# Altium PCB armBoardBeta.PcbDoc
Units mil, origin at the board's own origin, x right, y up, seen from the top; angles counter-clockwise.
Board outline 2225.94 x 1981.76 mil, 2 copper layers (Top Layer, Bottom Layer); 62 components, 60 nets, 227 pads, 70 vias.
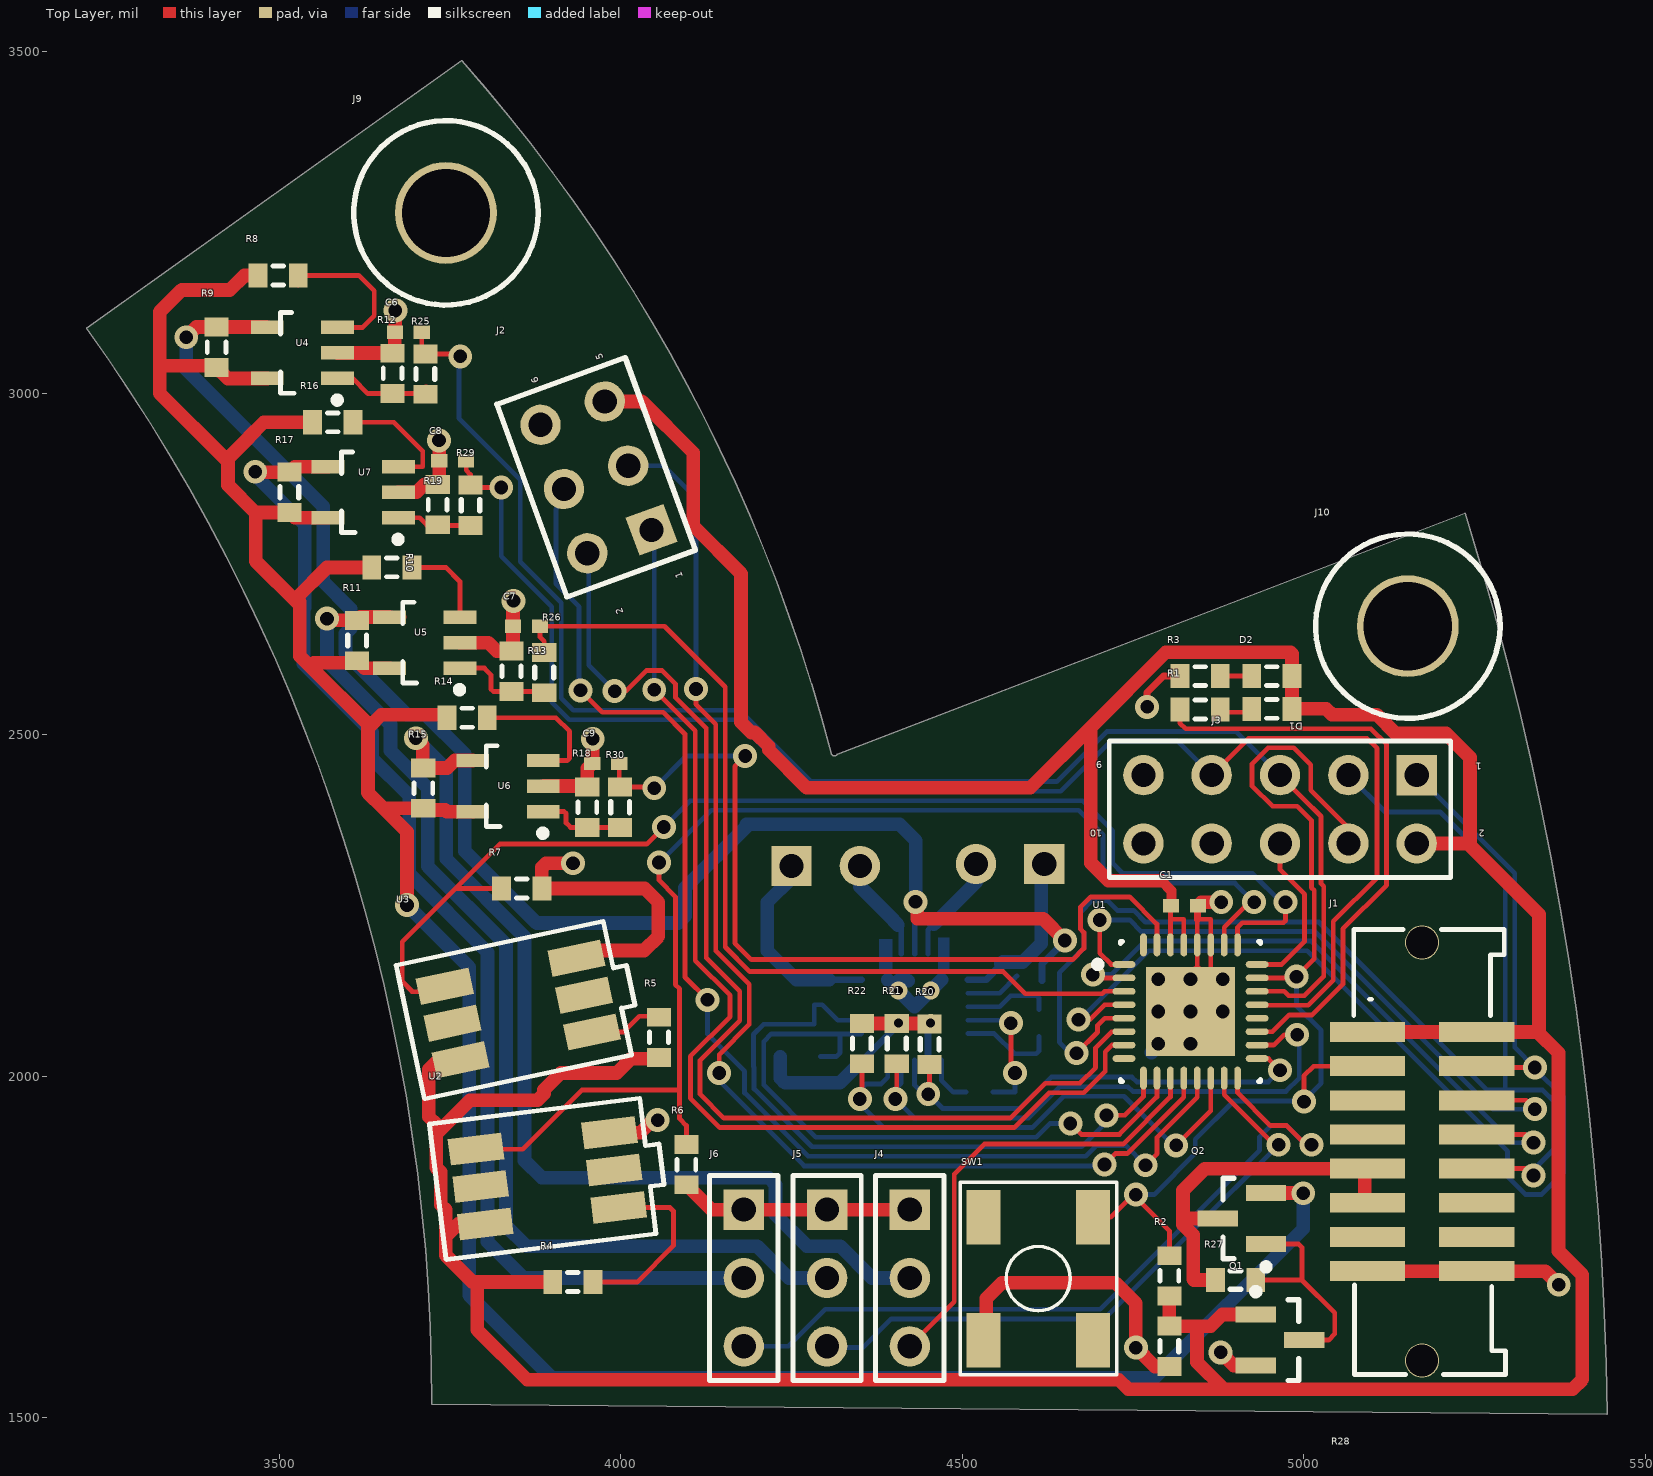
[diagram p0: Top Layer view]
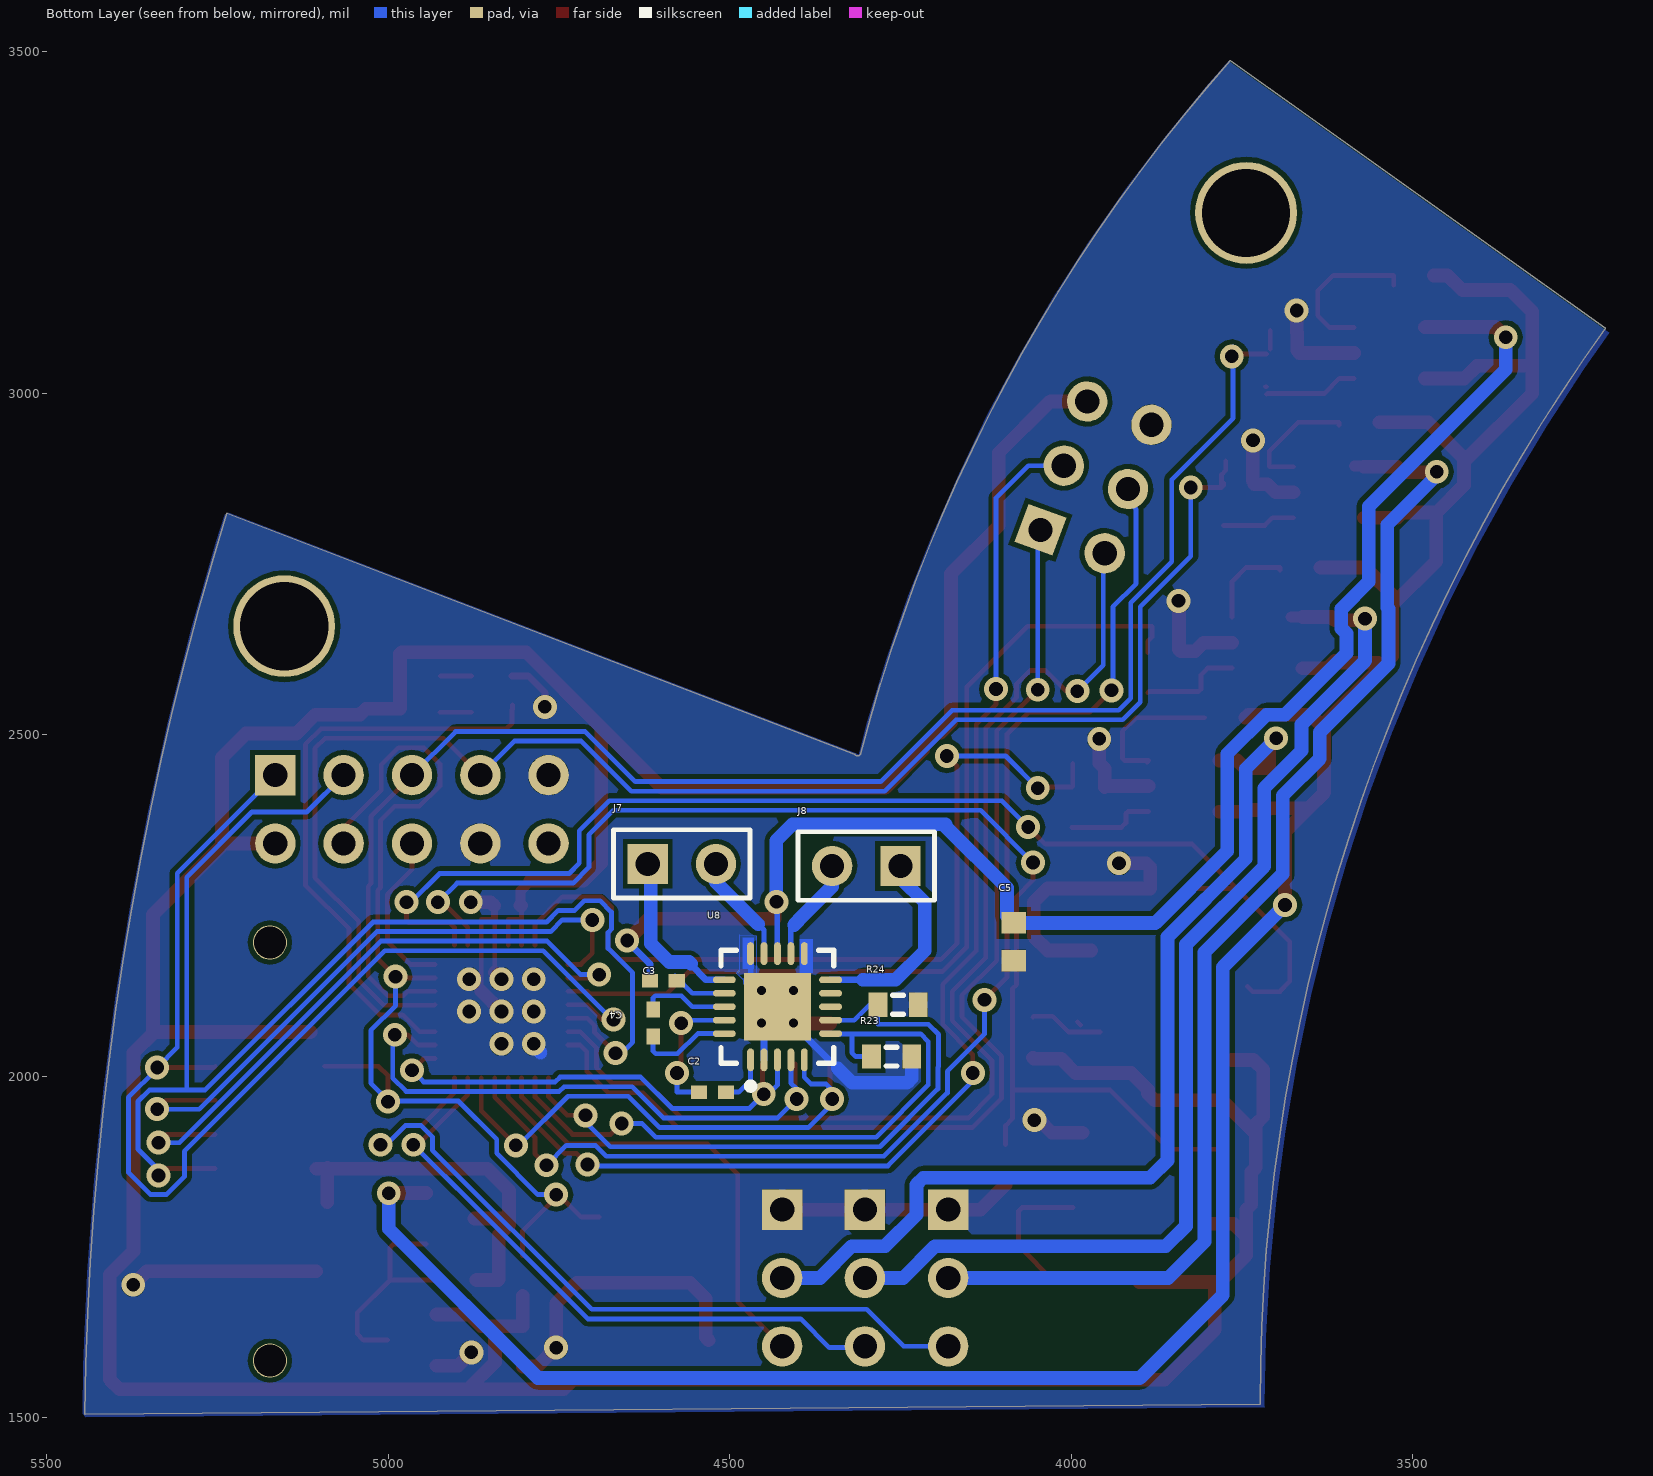
[diagram p1: Bottom Layer view, seen from below]

## Layer stack, top to bottom
Top Layer: signal copper 1.4
Dielectric: dielectric 12.6, FR-4, Dk 4.8
Bottom Layer: signal copper 1.4

## Board outline
3723.44,1519.91 ccw(c3718.43,1520) 3723.44,1519.99 ccw(c1023.38,1522.32) 3723.44,1522.32 ccw(c1023.38,1522.32) 3218.07,3095.12 3767.18,3486.93 cw(c1924.22,1852.95) 4307.91,2472.94 ccw(c4312.77,2474.2) 4316.98,2471.48 5235.25,2823.97 ccw(c5233.46,2828.65) 5236.11,2824.4 cw(c764.4,1443.71) 5444.01,1505.17

## Design rules (kind name [scope] priority, off if disabled: settings)
Clearance ClearanceGND [InNet('GND') vs InNet('GND')] p1: gap=0
Clearance ClearanceJ2 [InComponent('J2') vs Not InNet('GND')] p2: gap=0
Clearance ClearanceU7toU7 [InComponent('U7') vs InComponent('U7')] p3: gap=0
Clearance ClearanceU2toU2 [InComponent('U2') vs InComponent('U2')] p4: gap=0
Clearance ClearanceU1toU1 [InComponent('U1') vs InComponent('U1')] p5: gap=0
Clearance [All] p6: gap=7
ComponentClearance ComponentClearanceEdge [OnLayer('Mechanical 1')] p1: gap=15 collisioncheckmode=3 verticalgap=15 showdistances=FALSE
ComponentClearance ComponentClearance_1 [InComponent('J6')   or InComponent('J2')] p2: gap=0 collisioncheckmode=3 verticalgap=10 showdistances=FALSE
ComponentClearance [All] p3: gap=10 collisioncheckmode=3 verticalgap=10 showdistances=FALSE
HoleToHoleClearance HoleToHoleClearanceComponentU2 [InComponent('U2') vs InComponent('U2')] p1: gap=0 allowstackedmicrovias=TRUE
HoleToHoleClearance [All] p2: gap=7 allowstackedmicrovias=TRUE
MinimumSolderMaskSliver [All] p1: minsoldermaskwidth=7
PolygonConnect [All] p1: connectstyle=Relief reliefconductorwidth=10 reliefentries=4 polygonreliefangle="90 Angle"
RoutingVias [All] p1: holewidth=20 width=35 viastyle="Through Hole" minholewidth=20 minwidth=35 maxholewidth=28 maxwidth=50
SMDNeckDown [All] p1: percent=110.000
SilkToSilkClearance [All] p1: silktosilkclearance=0
SilkscreenOverComponentPads [All] p1: minsilkscreentomaskgap=0
SolderMaskExpansion [All] p1: expansion=4
Width "Schematic Width Constraint_VCC" [InNet('VBAT_SWITCHED')] p1: maxlimit=20 minlimit=7 preferedwidth=20
Width "Schematic Width Constraint_MOT0B" [InNet('MOT0_B')] p2: maxlimit=20 minlimit=7 preferedwidth=20
Width "Schematic Width Constraint_MOT0A" [InNet('MOT0_A')] p3: maxlimit=20 minlimit=7 preferedwidth=20
Width "Schematic Width Constraint_MOT1A" [InNet('MOT1_A')] p4: maxlimit=20 minlimit=7 preferedwidth=20
Width "Schematic Width Constraint_MOT1B" [InNet('MOT1_B')] p5: maxlimit=20 minlimit=7 preferedwidth=20
Width "Schematic Width Constraint_VBAT" [InNet('VBAT')] p6: maxlimit=20 minlimit=7 preferedwidth=20
Width "Schematic Width Constraint_GND" [InNet('GND')] p7: maxlimit=20 minlimit=7 preferedwidth=20
Width "Schematic Width Constraint_33V" [InNet('3.3V')] p8: maxlimit=20 minlimit=7 preferedwidth=20
Width Width_SERVOPOWER [InNet('SERVO0_POWER')  or  InNet('SERVO1_POWER')  or    InNet('SERVO2_POWER')  or    InNet('MOTOR_POWER')] p9: maxlimit=30 minlimit=7 preferedwidth=20
Width [All] p10: maxlimit=10 minlimit=7 preferedwidth=7
23 further rules are at their usual default settings.

## Components (designator, comment, footprint, x,y, rotation, side; value= is the part's Value field where it differs from the comment)
C1 "Cap Semi" CAPC1005L 4825,2250 r180 top
C2 "Cap Semi" CAPC1005L 4525,1977 r0 bottom
C3 "Cap Semi" CAPC1005L 4612,2078 r270 bottom
C4 "Cap Semi" CAPC1005L 4597,2140 r0 bottom
C5 "Cap Semi" CAPC1608L 4084,2197 r90 bottom
C6 "Cap Semi" CAPC1005L 3689,3089 r0 top
C7 "Cap Semi" CAPC1005L 3862,2659 r0 top
C8 "Cap Semi" CAPC1005L 3754,2901 r0 top
C9 "Cap Semi" CAPC1005L 3978,2458 r0 top
D1 "Heartbeat" SurfaceMount(603) 4953,2538 r180 top
D2 "Power LED" SurfaceMount(603) 4953,2586 r180 top
J1 "header" "HEADERSM 8X2" 5173,1890 r0 top
J2 "Header 3X2" HDR2X3 4045,2800 r110 top
J3 "JTAG" HDR2X5 5165,2441 r180 top
J4 "Header 3" HDR1X3 4423,1805 r270 top
J5 "Header 3" HDR1X3 4302,1805 r270 top
J6 "Header 3" HDR1X3 4180,1805 r270 top
J7 "Header 2" HDR1X2 4620,2311 r180 bottom
J8 "Header 2" HDR1X2 4250,2308 r0 bottom
J9 "Mechanical_Hole" #4_Screw_Hole 3744,3264 r0 top
J10 "Mechanical_Hole" #4_Screw_Hole 5152,2659 r0 top
Q1 "N-Mosfet" SOT-23 4965,1614 r0 top
Q2 "P-Mosfet" SOT-23 4909,1792 r180 top
R1 "DiodeRes" J1-0603 4848,2537 r180 top
R2 "ResetRes" J1-0603 4803,1708 r90 top
R3 "DiodeRes" J1-0603 4848,2586 r180 top
R4 "RLOAD" J1-0603 3930,1699 r0 top
R5 "RLOAD" J1-0603 4056,2057 r90 top
R6 "RLOAD" J1-0603 4096,1871 r270 top
R7 "RLOAD" J1-0603 3855,2275 r0 top
R8 "R_IN" J1-0603 3498.42,3172.4 r0 top
R9 "RLOAD" J1-0603 3408.42,3067.4 r90 top
R10 "R_IN" J1-0603 3665,2745 r0 top
R11 "RLOAD" J1-0603 3614,2638 r270 top
R12 "R_OUT" J1-0603 3666,3029 r90 top
R13 "R_OUT" J1-0603 3840,2593 r270 top
R14 "R_IN" J1-0603 3775,2525 r0 top
R15 "RLOAD" J1-0603 3711,2422 r90 top
R16 "R_IN" J1-0603 3578.42,2957.4 r0 top
R17 "RLOAD" J1-0603 3515,2855 r90 top
R18 "R_OUT" J1-0603 3951,2394 r270 top
R19 "R_OUT" J1-0603 3732,2837 r90 top
R20 "MotorRes" J1-0603 4452,2047 r90 top
R21 "MotorRes" J1-0603 4404,2048 r90 top
R22 "MotorRes" J1-0603 4353,2048 r90 top
R23 "MotorRes" J1-0603 4263,2029 r180 bottom
R24 "MotorRes" J1-0603 4253.53,2105 r180 bottom
R25 "R_OUT" J1-0603 3714,3028 r90 top
R26 "R_OUT" J1-0603 3888,2591 r90 top
R27 "RLOAD" J1-0603 4900,1702 r0 top
R28 "RLOAD" J1-0603 4803,1605 r270 top
R29 "R_OUT" J1-0603 3780,2836 r90 top
R30 "R_OUT" J1-0603 3999,2394 r90 top
SW1 "Switch-TL330" SwitchTall-TL330 4611,1704 r270 top
U1 "MSP430G2553" QFN-32 4834,2095 r0 top
U2 "absoluteEncoder" absoluteEncoder 4000,1864 r187 top
U3 "absoluteEncoder" absoluteEncoder 3956,2121 r192 top
U4 "LT6106" TSOT-23-5_LT6106 3534,3059 r180 top
U5 "LT6106" TSOT-23-5_LT6106 3713,2635 r180 top
U6 "LT6106" TSOT-23-5_LT6106 3835,2425 r180 top
U7 "LT6106" TSOT-23-5_LT6106 3623,2855 r180 top
U8 "MOTOR-A3906" QFN-20 4430,2102 r90 bottom

## Footprints (in the part's own frame and the unit in brackets; to place one, negate y for a bottom-side part, rotate by r counter-clockwise, add the part's x,y. Pads: shape width x height; smd on the part's side, far side on the other; paste and mask are expansions set on the pad)
#4_Screw_Hole [mil] "#4 Screw Hole, 3.2766mm Hole Dia., Plated"
  round 149 hole 129: 1(0,0)
  silkscreen extent -135,-135 135,135
absoluteEncoder [mm] "Absolute Encoder EE-SX1131"
  rect 2x1 smd: A(0.25,1.4) C(5.25,1.4) E1(5.25,0) E2(5.25,-1.4) K(0.25,-1.4) NC(0.25,0)
  silkscreen extent -1.52,-2.54 6.86,2.54
CAPC1005L [mm] "Chip Capacitor, Body 1.0x0.5mm, IPC High Density"
  rect 0.6x0.5 smd: 1(-0.5,0) 2(0.5,0)
  body extent -0.55,-0.3 0.55,0.3, height 1.3
CAPC1608L [mm] "Chip Capacitor, Body 1.6x0.8mm, IPC High Density"
  rect 0.8x0.9 smd: 1(-0.7,0) 2(0.7,0)
  body extent -0.87,-0.48 0.87,0.48, height 1.3
HDR1X2 [mm] "Connector; Header; 2 Position"
  rect 1.5x1.5 hole 0.9: 1(0,0)
  round 1.5 hole 0.9: 2(2.54,0)
  silkscreen extent -1.27,-1.27 3.81,1.27
HDR1X3 [mm] "Connector; Header; 3 Position"
  rect 1.5x1.5 hole 0.9: 1(0,0)
  round 1.5 hole 0.9: 2(2.54,0) 3(5.08,0)
  silkscreen extent -1.27,-1.27 6.35,1.27
HDR2X3 [mm] "Connector; Header; 3x2 Position"
  rect 1.5x1.5 hole 0.9: 1(0,0)
  round 1.5 hole 0.9: 2(0,2.54) 3(2.54,0) 4(2.54,2.54) 5(5.08,0) 6(5.08,2.54)
  silkscreen extent -1.27,-1.27 6.35,3.81
HDR2X5 [mm] "Connector; Header; 5x2 Position"
  rect 1.5x1.5 hole 0.9: 1(0,0)
  round 1.5 hole 0.9: 2(0,2.54) 3(2.54,0) 4(2.54,2.54) 5(5.08,0) 6(5.08,2.54) 7(7.62,0) 8(7.62,2.54) 9(10.16,0) 10(10.16,2.54)
  silkscreen extent -1.27,-1.27 11.43,3.81
"HEADERSM 8X2" [mm]
  rect 2.795x0.74 smd: 1(-2.033,4.445) 2(2.033,4.445) 3(-2.033,3.175) 4(2.033,3.175) 5(-2.033,1.905) 6(2.033,1.905) 7(-2.033,0.635) 8(2.033,0.635) 9(-2.033,-0.635) 10(2.033,-0.635) 11(-2.033,-1.905) 12(2.033,-1.905) 13(-2.033,-3.175) 14(2.033,-3.175) 15(-2.033,-4.445) 16(2.033,-4.445)
  round 1.27 hole 1.19: c1(0,7.773) c2(0,-7.773)
  silkscreen extent -2.54,-8.29 3.1,8.25
J1-0603 [mm] "Chip Resistor, Body 1.6x0.8mm, IPC High Density"
  rect 0.7x0.9 smd: 1(-0.75,0) 2(0.75,0)
  silkscreen extent -0.2,-0.35 0.2,0.35, body extent -0.85,-0.48 0.85,0.48, height 0.9
QFN-20 [mm] "QFN, 20-Leads, Body 4.2x4.2mm (max), Pitch 0.50mm, IPC Medium Density"
  oval 0.85x0.25 smd: 1(-1.975,1) 2(-1.975,0.5) 3(-1.975,0) 4(-1.975,-0.5) 5(-1.975,-1) 11(1.975,-1) 12(1.975,-0.5) 13(1.975,0) 14(1.975,0.5) 15(1.975,1)
  oval 0.25x0.85 smd: 6(-1,-1.975) 7(-0.5,-1.975) 8(0,-1.975) 9(0.5,-1.975) 10(1,-1.975) 16(1,1.975) 17(0.5,1.975) 18(0,1.975) 19(-0.5,1.975) 20(-1,1.975)
  rect 2.5x2.5 smd: 21(0,0)
  silkscreen extent -3.07,-2.1 2.1,2.1, body extent -2.07,-2.07 2.07,2.07, height 0.8
QFN-32 [mm] "QFN, 32-Leads, Body 5.2x5.2mm (max), Pitch 0.50mm, IPC Medium Density"
  oval 0.85x0.25 smd: 1(-2.475,1.75) 2(-2.475,1.25) 3(-2.475,0.75) 4(-2.475,0.25) 5(-2.475,-0.25) 6(-2.475,-0.75) 7(-2.475,-1.25) 8(-2.475,-1.75) 17(2.475,-1.75) 18(2.475,-1.25) 19(2.475,-0.75) 20(2.475,-0.25) 21(2.475,0.25) 22(2.475,0.75) 23(2.475,1.25) 24(2.475,1.75)
  oval 0.25x0.85 smd: 9(-1.75,-2.475) 10(-1.25,-2.475) 11(-0.75,-2.475) 12(-0.25,-2.475) 13(0.25,-2.475) 14(0.75,-2.475) 15(1.25,-2.475) 16(1.75,-2.475) 25(1.75,2.475) 26(1.25,2.475) 27(0.75,2.475) 28(0.25,2.475) 29(-0.25,2.475) 30(-0.75,2.475) 31(-1.25,2.475) 32(-1.75,2.475)
  rect 3.3x3.3 smd: 33(0,0)
  silkscreen extent -3.57,-2.6 2.6,2.6, body extent -2.57,-2.58 2.58,2.57, height 1
SOT-23 [mm] "SOT23, 3-Leads, Body 3.0x2.5mm (max), Pitch 0.95mm, IPC Medium Density"
  rect 1.5x0.6 smd: 1(-0.9,0.95) 2(-0.9,-0.95) 3(0.9,0)
  silkscreen extent -1.02,-1.5 0.7,1.92, body extent -0.7,-1.5 0.7,1.5, height 1.2
SurfaceMount(603) [mm]
  rect 0.7x0.9 smd: 1(-0.75,0) 2(0.75,0)
  silkscreen extent -0.2,-0.35 0.2,0.35, body extent -0.85,-0.48 0.85,0.48, height 0.9
SwitchTall-TL330 [mil] "Small SMDTall Tact Switch E-Switch TL330"
  rect 80x50 smd: 1(-90,80) 2(90,80) 3(-90,-80) 4(90,-80)
  silkscreen extent -141,-114 141,115
TSOT-23-5_LT6106 [mm] "A SOT-23 package with 5 pins for LT6106"
  rect 1.22x0.5 smd: 1(-1.31,0.95) 2(-1.31,0) 3(-1.31,-0.95) 4(1.31,-0.95) 5(1.31,0.95)
  silkscreen extent -1.42,-1.5 0.81,1.88, body extent -0.81,-1.5 0.84,1.5, height 1.2

## Part data
C1 C2 C3 C4 C5 C6 C7 C8 C9: "Capacitor (Semiconductor SIM Model)"
D1 D2: library part LED
J1: library part "HEADER 8X2"
J2: "Header, 3-Pin, Dual row"
J3: library part "Header 5X2", "Header, 5-Pin, Dual row"
J4 J5 J6: "Header, 3-Pin"
J7 J8: "Header, 2-Pin"
J9 J10: "A mechanical hole for mounting the board"
R1 R2 R3 R4 R5 R6 R7 R8 R9 R10 R11 R12 R13 R14 R15 R16 R17 R18 R19 R20 R21 R22 R23 R24 R25 R26 R27 R28 R29 R30: library part Res3, "Resistor"
U4 U5 U6 U7: "Current Sense Amplifier"

## Via types
v1: diameter 35, hole 20, Top Layer to Bottom Layer, 66 vias
v2: diameter 25.98, hole 12.99, Top Layer to Bottom Layer, tented top, 4 vias

## Nets (pads, with @x,y where several pads share a name; then routed paths per layer and width w, separated by ;. In a path a pad name is that pad's centre, name@x,y a point inside that pad or via, vN(x,y) a via of type N, cw(c..) or ccw(c..) an arc to the next point about the centre after c; other vN are vias at no path point)
3.3V: C1.2 D1.1 D2.1 J1.1 J1.2 J2.5 J3.2 Q1.1 R2.1 R4.1 R5.1 R28.1 U1.29 U1.30 U2.C U3.C | length 6598.8
  Top Layer w7: U1.30 C1.2@4804.47,2240.47 ; 4804.84,2230 4824.16,2230 U1.29
  Top Layer w15: 4791.5,2286.5 4806,2272 C1.2@4806,2250.69
  Top Layer w20: U3.C 3733.11,2024.11 3719,2010 3719,1941 3729.66,1930.34 3729.66,1915.3 ; U2.C 3762.1,1784.1 3744,1766 ; R4.1 3790,1699 ; J2.5 4030.94,2987.94 4106,2912.88 4106,2806 4176,2736 4176,2518.5 4191,2503.5 4196.29,2503.5 4216.5,2483.29 4216.5,2478 4272,2422.5 4599.43,2422.5 4688.1,2511.17 ; R5.1 4054.53,2026 4015,2026 3994,2005 3912,2005 3887.5,1980.5 3887.5,1974.49 3878.01,1965 3779.35,1965 3729.66,1915.3 ; 4791.5,2286.5 4714,2286.5 4688.1,2312.4 4688.1,2511.17 ; R2.1 R28.1 4837,1634.53 ; C1.2 C1.2@4806,2250.69 ; Q1.1 4880.4,1651.4 4863.53,1634.53 4837,1634.53 ; J1.1@5112.98,2065 J1.2 5342,2065 ; J3.2 5240,2341 ; 3729.66,1915.3 3729.66,1866.72 3736.37,1860 3736.37,1812.23 3744,1804.6 3744,1766 ; 3744,1766 3744,1738 3783,1699 3790,1699 ; 3790,1699 3790,1629 3863,1556 4729,1556 4743,1542 4883.21,1542 ; 4688.1,2511.17 4797.65,2620.72 4980.34,2620.72 4982.53,2618.53 D2.1 D1.1 5032.53,2538 5041,2529.53 5106.46,2529.53 5133.99,2502 5208,2502 5243,2467 5243,2338 5344,2237 5344,2067 5342,2065 ; 4837,1634.53 4843.5,1628.03 4843.5,1581.71 4883.21,1542 ; 4883.21,1542 5393,1542 5407.5,1556.5 5407.5,1709.29 5372.5,1744.29 5372.5,2034.5 5342,2065
ENCODER0: R6.1 U1.26 U2.E2 | length 1839.2
  Top Layer w7: U2.E2 3856.52,1893.52 3943,1980 4085,1980 4086,1979 ; U2.E2@3801.56,1885.56 U2.E2@3805.13,1882 ; v1(4056,2313) 4056,2287 4080,2263 4080,2134 4086,2128 4086,1979 ; R6.1 4096,1928 4086,1938 4086,1979 ; U1.26 4883.21,2218.11 4920.1,2255 v1(4927,2255)
  Bottom Layer w7: v1(4056,2313) 4132.5,2389.5 4670.28,2389.5 4706,2353.78 4706,2306.2 4729.2,2283 4899,2283 v1(4927,2255)
ENCODER1: R7.1 U1.25 U3.E2 | length 1792.6
  Top Layer w7: U3.E2 3734.42,2124 3694,2124 3694,2125 3680,2139 3680,2197 3758,2275 ; R7.1 3758,2275 ; v1(4063,2365) 4038,2340 3823,2340 3758,2275 ; U1.25 4902.9,2218 4909.9,2225 4970,2225 4973,2228 v1(4973,2255)
  Bottom Layer w7: v1(4063,2365) 4101.5,2403.5 4676.07,2403.5 4720,2359.57 4720,2312 4735,2297 4924.6,2297 4966.6,2255 v1(4973,2255)
FTDI_RX: J1.5
FTDI_TX: J1.7
GND: C1.1 C5.1 C6.1 C7.1 C8.1 C9.1 J1.15 J1.16 J2.6 J3.8 J3.9 J4.1 J5.1 J6.1 Q1.2 R3.2 R6.2 R7.2 R12.2 R13.1 R18.1 R19.2 R20.2 R21.2 R22.2 R23.2 R24.2 R28.2 SW1.4 U1.27 U1.28 U1.33 U2.K U3.K U4.2 U5.2 U6.2 U7.2 U8.2 U8.11 U8.15 U8.21 | length 3155.9
  Top Layer w7: U1.33@4843.84,2152.09 U1.28 4843.84,2229.84 ; 4844,2230 4863.53,2230 U1.27 U1.33@4863.53,2124.53
  Top Layer w10: v1(4770.47,2541) 4770.47,2562.09 4794.39,2586 R3.2 ; 4843.84,2229.84 4844,2230 C1.1@4844,2250
  Top Layer w20: U4.2 R12.2@3665.47,3059 ; R12.2 3665.53,3059 R12.2@3665.47,3059 ; v1(3670,3121) 3670,3089.69 C6.1 3669.32,3062.84 R12.2@3665.47,3059 ; U7.2 3701,2855 3713,2867 3731.53,2867 R19.2 ; v1(3734,2931) 3734.32,2930.68 C8.1 R19.2@3734.32,2871.84 ; U5.2 3806,2635 3818.47,2622.53 R13.1 3842.32,2624.84 C7.1 3842.32,2695.32 v1(3843,2696) ; U6.2 3949.53,2425 R18.1 3951,2450.69 C9.1 3959,2458.69 v1(3959,2494) ; v1(3930,2312) 3890.53,2312 3884.53,2306 R7.2 4035,2275 4055,2255 4055,2205 4034.21,2184.21 U3.K@3970.58,2184.21 ; U2.K 4028.51,1917.51 4048,1937 4054,1937 v1(4054,1936) ; R6.2 4132.47,1805 J6.1 J5.1 J4.1 ; R22.2 R21.2 R20.2@4451,2077.53 ; SW1.4 4535,1618 4535,1675 4558,1698 4724,1698 4754,1668 v1(4754,1603) 4781.53,1575.47 R28.2 ; v1(4834,2095) U1.33@4863.53,2124.53 ; v1(4834,2142.24) U1.33@4843.84,2152.09 ; C1.1 4849.69,2255 v1(4879,2255) ; v1(4878,1596) 4897.4,1576.6 Q1.2 ; J1.15@5104.98,1715 J1.16 5353,1715 v1(5373,1695)
  Bottom Layer w8: U8.21@4390.63,2141.37 U8.11 ; U8.21@4469.37,2141.37 U8.15
  Bottom Layer w10: 4341.79,2011.79 U8.21@4405.5,2075.5 ; U8.2 U8.21@4449.69,2074.44
  Bottom Layer w20: R23.2 4233.47,1997.53 4240.5,1990.5 4320.5,1990.5 4341.79,2011.79 ; U8.21@4390.63,2141.37 v2(4406.38,2125.62) U8.21 v2(4453.62,2125.62) U8.21@4469.37,2141.37 ; U8.21@4407.13,2140.68 U8.21@4420.76,2140 ; U8.21@4449.69,2074.44 v2(4453.62,2078.38) ; v1@4776.76,2035 4786.76,2045 v1(4786.76,2047.76)
  other v1: 4834,2047.76 4786.76,2095 4881.24,2095 4786.76,2142.24 4881.24,2142.24
  other v2: 4406.38,2078.38
GPIO0: J2.1 U1.7 | length 1627.3
  Top Layer w7: v1(4049,2566) 4109,2506 4109,2169.6 4160,2118.6 4160,2087.6 4102,2029.6 4102,1968 4145,1925 4576,1925 4627,1976 4677.8,1976 4709,2007.2 4709,2036.2 4718.59,2045.79 U1.7
  Bottom Layer w7: J2.1 4049,2796 v1@4049,2567 ; v1(4049,2566) v1@4049,2567 ; v1@4052,2564 v1@4049,2567
GPIO1: J2.2 U1.6 | length 1695.9
  Top Layer w7: v1(3991,2564) 4007.4,2564 4037.4,2594 4060.6,2594 4080,2574.6 4080,2554.8 4125,2509.8 4125,2173.4 4174,2124.4 4174,2081.8 4116,2023.8 4116,1973.8 4150.8,1939 4570.2,1939 4621.2,1990 4672,1990 4695,2013 4695,2042 4718.47,2065.47 U1.6
  Bottom Layer w7: J2.2 3953,2763.83 3953,2602 v1(3991,2564)
GPIO2: J2.3 U1.12 | length 1824.1
  Top Layer w7: v1(4110,2567) 4110,2544.6 4139,2515.6 4139,2401.99 4139,2183.6 4188,2134.6 4188,2076 4144,2032 v1(4144,2005) ; v1(4708,1871) 4724,1887 4741.4,1887 4824.16,1969.76 U1.12
  Bottom Layer w7: J2.3 4063.03,2893.97 4110,2847 v1(4110,2567) ; v1(4144,2005) 4144,1993.3 4268.3,1869 4706,1869 v1(4708,1871)
GPIO3: J2.4 U1.13 | length 1858.2
  Top Layer w7: v1(3941,2565) 3973,2533 4062,2533 4094,2501 4094,2145 v1(4127,2112) ; v1(4768,1870) 4785,1887 4785,1910.6 4843.84,1969.44 U1.13
  Bottom Layer w7: J2.4 3916.83,2841.95 3905,2830.12 3905,2721.2 3939,2687.2 3939,2578 3941,2576 v1(3941,2565) ; v1(4127,2112) 4127,2061.6 4181.19,2007.41 4181.19,1975.91 4274.1,1883 4680.4,1883 4696.4,1899 4739,1899 v1(4768,1870)
I2C_SCL: J1.13
I2C_SDA: J1.14
JTAG_BOTTOM_TCK_SPI_CLK: J1.4 J3.1 U1.4 | length 1767
  Top Layer w7: v1(4670,2083) 4686.4,2083 4708.24,2104.84 U1.4 ; J1.4 5255.02,2013 v1(5338,2013)
  Bottom Layer w7: v1(4670,2083) 4672,2083 4773,2184 5004.6,2184 5298,1890.6 5298,1853.4 5324.4,1827 5347.6,1827 5380,1859.4 5380,1969.4 5338,2011.4 v1(5338,2013) 5308.61,2042.39 5308.61,2297.39 J3.1
JTAG_BOTTOM_TDI_SERVO2_SENSE: C8.2 J3.7 R29.2 U1.21 | length 2274.4
  Top Layer w7: C8.2 3773.69,2887.31 3780,2881 R29.2 3777,2868.53 3777,2865.53 3780.53,2862 v1(3825,2862) ; J3.7 4919.03,2495.03 5092.17,2495.03 5107,2480.2 5107,2291 5043,2227 5043,2140.6 5006.4,2104 4932.28,2104 U1.21
  Bottom Layer w7: v1(3825,2862) 3825,2761.6 3899,2687.6 3899,2547.6 3924.6,2522 4168.6,2522 4273.1,2417.5 4643.89,2417.5 4717.2,2490.8 4815.2,2490.8 J3.7
JTAG_BOTTOM_TDO_MOTOR_SENSE: C6.2 J3.5 R25.2 U1.22 | length 2300.4
  Top Layer w7: R25.2@3708.69,3064.84 C6.2 C6.2@3708.69,3092 ; R25.2 3761.47,3057.53 v1(3765,3054) ; U1.22 4970.87,2124.53 4977.4,2118 5000.6,2118 5029,2146.4 5029,2278.2 5024.97,2282.22 5024.97,2380.43 4999.23,2406.18 ; J3.5@4964,2465 4964,2441.41 J3.5@4965,2440.41 ; J3.5 J3.5@4965,2440.41 ; 5018.03,2387.38 4999.23,2406.18 ; J3.5@4965,2440.41 4999.23,2406.18
  Bottom Layer w7: v1@3763,3068 3763,2963.6 3853,2873.6 3853,2753.4 3913,2693.4 3913,2553.4 3930.4,2536 4174.4,2536 4278.9,2431.5 4638.09,2431.5 4711.4,2504.8 4901.2,2504.8 J3.5
JTAG_BOTTOM_TEST: J3.6 U1.24 | length 241.8
  Top Layer w7: U1.24 4967.3,2163.9 5001,2197.6 5001,2266.6 4965,2302.6 J3.6
JTAG_BOTTOM_TMS_SPI_SEL_EXPAND0: J1.10 J3.3 U1.5 | length 1968.3
  Top Layer w7: v1(4667,2034) 4698,2065 4698,2074.8 4708.35,2085.16 U1.5 ; J1.10 5326,1865 v1(5336,1855)
  Bottom Layer w7: v1(4667,2034) 4658,2034 4642,2050 4642,2151.4 4678,2187.4 4678,2210.6 4673,2215.6 4673,2240.6 4689.4,2257 4712.6,2257 4726.6,2243 4750.8,2243 4767.8,2226 5021.99,2226 5267.99,1980 5349.6,1980 5366,1963.6 5366,1893.4 5336,1863.4 v1(5336,1855) ; J3.3 5119,2387 5199.2,2387 5294.61,2291.59 5294.61,1980
LED_HEARTBEAT: R1.2 U1.19 | length 874.4
  Top Layer w7: R1.2@4817.94,2537 R1.2@4817.94,2544 ; R1.2 4818.47,2517.2 4826.89,2508.78 4895.66,2508.78 4895.9,2509.03 5097.97,2509.03 5121,2486 5121,2280 5057,2216 5057,2134.8 5012.2,2090 4978.4,2090 4953.87,2065.47 U1.19
MOT0_A: J7.1 U8.16 | length 253.1
  Bottom Layer w10: U8.16 4534.37,2141.37 4557.19,2164.19 4560.5,2167.5
  Bottom Layer w20: 4556.5,2164.88 4559.12,2167.5 4560.5,2167.5 4588.39,2167.5 4615.5,2194.61 4615.5,2306.5 J7.1
MOT0_B: J7.2 U8.14 | length 160.4
  Bottom Layer w8: U8.14 4449.69,2213.99 4458.35,2222.65
  Bottom Layer w20: 4458.35,2222.65 4520,2284.3 J7.2
MOT0_PWMA: R21.1 U1.18 U8.4 | length 875.3
  Top Layer w7: v1(4402,1967) 4404,1969 R21.1 ; U1.18 4955.79,2045.79 4971,2061 v1(4990,2061)
  Bottom Layer w7: U8.4 4410.32,1990 4402,1981.68 v1(4402,1967) 4430,1939 4596.6,1939 4642.6,1985 4742.4,1985 4749.4,1978 4973.6,1978 4993,1997.4 4993,2058 v1(4990,2061)
MOT0_PWMB: R22.1 U1.14 U8.5 | length 792.5
  Top Layer w7: v1(4350,1967) 4353,1970 R22.1 ; v1(4813,1899) 4863.53,1949.53 U1.14
  Bottom Layer w7: U8.5 4390.63,1998.63 4381,1989 4359,1989 4350,1980 v1(4350,1967) 4350,1960 4385,1925 4602.4,1925 4648.4,1971 4736.6,1971 4808.6,1899 v1(4813,1899)
MOT1_A: J8.1 U8.10 | length 294.1
  Bottom Layer w10: 4305,2141.37 U8.10
  Bottom Layer w20: J8.1 4250,2290.5 4214.5,2255 4214.5,2184.01 4257.14,2141.37 4305,2141.37
MOT1_B: J8.2 U8.12 | length 153.2
  Bottom Layer w8: 4405.66,2221.66 4410.32,2217 U8.12
  Bottom Layer w20: J8.2 4350,2278 4400,2228 4400,2227.32 4405.66,2221.66
MOT1_PWMA: R23.1 U1.10 U8.6 | length 942.5
  Top Layer w7: v1(4658,1931) 4674,1915 4729.8,1915 4784.79,1969.99 U1.10
  Bottom Layer w7: R23.1 4315.51,2029 4321,2034.49 4321,2062.27 ; U8.6 4351.89,2062.27 4321,2062.27 ; v1(4658,1931) 4628.2,1931 4608.2,1911 4285.7,1911 4209.19,1987.5 4209.19,2051.07 4220.4,2062.27 4321,2062.27
MOT1_PWMB: R24.1 U1.9 U8.7 | length 941.2
  Top Layer w7: v1(4711,1943) 4738,1943 4765.1,1970.1 U1.9
  Bottom Layer w7: U8.7 4317.68,2082.32 4295,2105 R24.1 4283.06,2076.27 4209,2076.27 4194.27,2061.55 4194.27,2014.12 4195.19,2013.2 4195.19,1981.71 4279.9,1897 4674.6,1897 v1@4711,1933.4
MOT_SLEEP: R20.1 U1.17 U8.3 | length 700.3
  Top Layer w7: v1(4450,1974) 4452,1976 R20.1 ; U1.17 4947.9,2026.1 v1(4965,2009)
  Bottom Layer w7: U8.3 4430,1987 4443,1974 v1(4450,1974) 4471,1953 4584,1953 4630,1999 4748.2,1999 4755.2,1992 4948,1992 v1(4965,2009)
MOTOR_POWER: C4.2 C5.2 R9.2 U4.4 U8.13 | length 2362.4
  Top Layer w20: v1(3364,3082) 3378.93,3096.93 R9.2 3481.9,3096.93 U4.4 ; v1(4431.35,2255.44) 4434,2252.79 4434,2231 4618,2231 v1(4650,2199)
  Bottom Layer w8: U8.13 v1@4430,2254.09
  Bottom Layer w10: C4.2 4616.69,2164.69 v1@4650,2198
  Bottom Layer w20: v1(3364,3082) 3364,3034.79 3564.5,2834.29 3564.5,2724.29 3604.5,2684.29 3604.5,2655.71 3597,2648.21 3597,2619.37 3686.87,2529.5 3714.29,2529.5 3771.55,2472.24 3771.55,2329.79 3876.78,2224.56 C5.2 4094,2234.56 4094,2276 4184,2366 4184,2369 4408,2369 4432,2345 4432,2256.09 v1(4431.35,2255.44) ; v1@4430,2254.09 v1(4431.35,2255.44) ; v1@4431.35,2254.65 v1(4431.35,2255.44) ; v1@4650,2198 v1(4650,2199)
NetC2_1: C2.1 U8.1 | length 73.1
  Bottom Layer w7: U8.1 4469.37,1994.23 4486.6,1977 C2.1
NetC2_2: C2.2 U8.19 | length 200.8
  Top Layer w7: v1(4571,2078) 4571,2011 v1(4577,2005)
  Bottom Layer w7: U8.19 4566.68,2082.32 v1(4571,2078) ; C2.2 4577,1977 v1(4577,2005)
NetC3_1: C3.1 U8.18 | length 129.4
  Bottom Layer w7: U8.18 4554.66,2102 4570.66,2118 4609,2118 4612,2115 C3.1
NetC3_2: C3.2 U8.20 | length 139.5
  Bottom Layer w7: U8.20 4546.77,2062.63 4576.4,2033 4608,2033 4612,2037 C3.2
NetC4_1: C4.1 U8.17 | length 154.2
  Bottom Layer w7: U8.17 4554.55,2121.69 ; 4554.55,2121.69 C4.1@4579.86,2147 ; 4554.55,2121.69 C4.1@4579.86,2147 ; 4554.55,2121.69 4575.09,2142.23 C4.1@4579.86,2147
NetD1_2: D1.2 R1.1 | length 45.9
  Top Layer w7: R1.1@4878,2533 D1.2@4923.94,2533
NetD2_2: D2.2 R3.1 | length 45.9
  Top Layer w7: R3.1 D2.2
NetQ1_3: Q1.3 Q2.1 R27.2 | length 317.1
  Top Layer w7: R27.2 4997,1702 ; Q2.1 4992.4,1754.6 4997,1750 4997,1702 ; Q1.3 5036,1614 5045,1623 5045,1654 4997,1702
NetR4_2: R4.2 U2.A | length 272.6
  Top Layer w7: R4.2 4024,1699 4077,1752 4077,1803 4071.91,1808.09 U2.A
NetR5_2: R5.2 U3.A | length 115.3
  Top Layer w7: U3.A 4004.04,2065.04 4027,2088 4054.53,2088 R5.2 ; U3.A@3985.92,2075.05 U3.A@3990.88,2080
NetR8_2: R8.2 U4.3 | length 231.6
  Top Layer w7: R8.2@3527.95,3158.18 R8.2 3616.6,3172.4 3639,3150 3639,3113.4 3622,3096.4 U4.3
NetR10_2: R10.2 U5.3 | length 134.6
  Top Layer w7: R10.2@3694.53,2741 R10.2 3744,2745 3764.57,2724.43 U5.3
NetR12_1: R12.1 R25.1 U4.1 | length 140
  Top Layer w7: U4.1 3607.4,3021.6 3629.53,2999.47 R12.1 3713,2999.47 R25.1 ; R25.1@3714,3009.47 R25.1@3716,3009.47
NetR13_2: R13.2 R26.1 U5.1 | length 150.7
  Top Layer w7: U5.1 3800.4,2597.6 3810,2588 3810,2567 3813.53,2563.47 R13.2 3886,2563.47 R26.1
NetR14_2: R14.2 U6.3 | length 211.1
  Top Layer w7: R14.2 3905,2525 3925,2505 3925,2466 3921.4,2462.4 U6.3 U6.3@3888.98,2460
NetR16_2: R16.2 U7.3 | length 182.3
  Top Layer w7: R16.2@3607.95,2953 R16.2 3668,2957.4 3710,2915.4 3710,2892.4 U7.3
NetR18_2: R18.2 R30.1 U6.1 | length 130.2
  Top Layer w7: U6.1 3917.4,2387.6 3920,2385 3920,2371 3926.53,2364.47 R18.2 R30.1
NetR19_1: R19.1 R29.1 U7.1 | length 107
  Top Layer w7: U7.1 3705.4,2817.6 3716.53,2806.47 3728,2806.47 R29.1@3777,2806.47
RESET_430: J1.3 J3.4 R2.2 SW1.1 U1.23 | length 1528.4
  Top Layer w7: SW1.1 4717,1794 4750,1827 v1(4754,1827) 4754,1823.03 4803,1774.03 R2.2 ; U1.23 4987.21,2144.21 v1(4989,2146) 5015,2172 5015,2272.4 5010.97,2276.42 5010.97,2374.63 4990.3,2395.3 4954,2395.3 4924.3,2425 4923.97,2425 4923.97,2457.58 4947.42,2481.03 4984.97,2481.03 5010,2456 5010,2419 5065,2364 J3.4 ; v1(5000,1963) 5000,2001 5014,2015 J1.3
  Bottom Layer w7: v1(4754,1827) 4780.6,1827 4841,1887.4 4841,1908 4897,1964 4999,1964 5025,1990 5025,2067.6 4989,2103.6 v1(4989,2146)
SERVO0: J4.3 U1.11 | length 669.8
  Top Layer w7: J4.3 4488,1670 4488,1857 4532,1901 4735.6,1901 4804.47,1969.87 U1.11
SERVO0_POWER: J4.2 R15.2 U6.4 | length 1466.5
  Top Layer w20: v1(3700,2495) 3710,2485 R15.2@3710,2454.53 ; R15.2 3746.13,2451.53 3757,2462.4 U6.4
  Bottom Layer w20: v1(3700,2495) 3744.55,2450.45 3744.55,2318.61 3859,2204.16 3859,1877 3884.47,1851.53 4216.57,1851.53 4226.53,1841.57 4226.53,1797.38 4272.38,1751.53 4321.27,1751.53 4367.8,1705 J4.2
SERVO1: J5.3 U1.15 | length 946.3
  Top Layer w7: U1.15 4883.21,1973 4956.21,1900 v1(4963,1900)
  Bottom Layer w7: J5.3 4303.97,1603.03 4354,1603.03 4396,1645.03 4707.63,1645.03 4898,1835.4 ; 4917,1854.4 4898,1835.4 ; v1(4963,1900) 4898.4,1835.4 4898,1835.4
SERVO1_POWER: J5.2 R11.1 U5.4 | length 1610.4
  Top Layer w15.75: U5.4 U5.4@3678.43,2672.4
  Top Layer w20: v1(3570,2670) 3572.47,2667.53 R11.1 3618.87,2672.4 U5.4
  Bottom Layer w20: v1(3570,2670) 3570,2608.18 3663,2515.18 3663,2476.55 3717.55,2422 3717.55,2307.42 3832,2192.97 3832,1781.06 3861.53,1751.53 4199.27,1751.53 4245.8,1705 J5.2
SERVO1_SENSE: C7.2 R26.2 U1.3 | length 1343.2
  Top Layer w7: R26.2 3888,2637 3881.69,2643.31 C7.2 4064,2659 4153,2570 4153,2396.2 4153,2189.4 4189,2153.4 4559.81,2153.4 4592.2,2121 4704.6,2121 4708.13,2124.53 U1.3
SERVO2: J6.3 U1.16 | length 1148.9
  Top Layer w7: U1.16 4902.9,1976 4950.9,1928 4974.6,1928 5002.6,1900 v1(5011,1900)
  Bottom Layer w7: J6.3 4245.39,1605 4299.42,1659.03 4701.83,1659.03 4935,1892.2 4935,1911.6 4951.4,1928 4974.6,1928 5002.6,1900 v1(5011,1900)
SERVO2_POWER: J6.2 R17.2 U7.4 | length 1801.8
  Top Layer w15.75: U7.4@3560,2893.4 U7.4@3585.43,2893.4
  Top Layer w20: v1(3465,2885) 3465.47,2884.53 R17.2 3522.87,2892.4 U7.4
  Bottom Layer w20: v1(3465,2885) 3465,2880 3537.5,2807.5 3537.5,2686.29 3535.5,2684.29 3535.5,2604.5 3636,2504 3636,2465.37 3690.55,2410.82 3690.55,2296.24 3805,2181.79 3805,1758 3858,1705 J6.2
SERVO2_SENSE: C9.2 R30.2 U1.31 | length 1273.6
  Top Layer w7: C9.2 3997.69,2424.84 R30.2 4047.47,2423.53 v1(4049,2422) ; v1(4182,2469) 4167,2454 4167,2390.4 4167,2195.2 4191.2,2171 4661.6,2171 4678,2187.4 4678,2210.6 4673,2215.6 4673,2248 4687.79,2262.79 4745,2262.79 4784.79,2223 U1.31
  Bottom Layer w7: v1(4049,2422) 4096,2469 v1(4182,2469)
SPI_MISO: J1.6 U1.1 | length 933
  Top Layer w7: v1(4701,2229) 4701,2180.6 4717.7,2163.9 U1.1 ; J1.6 5325,1965 v1(5338,1952)
  Bottom Layer w7: v1(4701,2229) 4745,2229 4762,2212 5016.2,2212 5276.2,1952 v1(5338,1952)
SPI_MOSI: J1.8 U1.2 | length 923
  Top Layer w7: v1(4691,2149) 4695.79,2144.21 U1.2 ; J1.8 5324,1915 v1(5336,1903)
  Bottom Layer w7: v1(4691,2149) 4718.2,2149 4767.2,2198 5010.4,2198 5305.4,1903 v1(5336,1903)
SPI_SEL_EXPAND1: J1.12
VBAT: J1.9 J1.11 Q2.3 R27.1 | length 564.9
  Top Layer w20: R27.1 4839,1702 4837.72,1703.28 4837.72,1768.31 4823,1783.02 4823,1792 ; Q2.3 4823,1792 ; J1.11@5089,1816 J1.9@5089,1866 ; J1.9@5104.98,1865 4855,1865 4823,1833 4823,1792
VBAT_SWITCHED: Q2.2 R8.1 R9.1 R10.1 R11.2 R14.1 R15.1 R16.1 R17.1 U4.5 U5.5 U6.5 U7.5 | length 4208.8
  Top Layer w20: R8.1 3449,3172.4 3427.6,3151 3357.21,3151 3325,3118.79 3325,3040 ; U4.5 3424.7,3021.6 R9.1 3406.3,3040 3325,3040 ; R16.1 3477.4,2957.4 3455,2935 3455,2934.53 3422.74,2902.26 ; U7.5 3522.87,2817.6 R17.1 3465,2825.47 ; R11.2 R11.2@3617,2605.47 ; R10.1 3570,2745 3525,2700 3530,2695 3530,2690 ; U5.5 3624.87,2597.6 R11.2@3617,2605.47 ; v1(3687,2251) 3687,2358 3652.53,2392.47 ; R14.1 3740.97,2529.5 3649.5,2529.5 3632.74,2512.74 ; U6.5 3745.4,2387.6 3743,2390 3713.47,2390 R15.1 3652.53,2392.47 ; Q2.2 4998.6,1829.4 v1(4999,1829) ; 3325,3040 3325,3000 3422.74,2902.26 ; 3422.74,2902.26 3425,2900 3425,2865.47 3465,2825.47 ; 3465,2825.47 3465.5,2824.97 3465.5,2754.5 3530,2690 ; 3530,2690 3530,2615.47 3545.47,2600 ; 3545.47,2600 3632.74,2512.74 ; 3545.47,2600 3550.94,2605.47 R11.2@3617,2605.47 ; 3632.74,2512.74 3630,2510 3630,2415 3652.53,2392.47
  Bottom Layer w20: v1(3687,2251) 3778,2160 3778,1680 3899.53,1558.47 4780.47,1558.47 4999,1777 v1(4999,1829)
pads on no net: J1.c1 J1.c2 J3.10 J9.1 J10.1 SW1.2 SW1.3 U1.8 U1.20 U1.32 U2.E1 U2.NC U3.E1 U3.NC U8.8 U8.9

## Polygon pours and split planes (outlines as drawn)
GND on Bottom Layer "Bottom Layer" (solid, remove dead copper, pour order 2): 3716.61,1515.92 5447.21,1501.1 5447.21,1501.12 ccw(c762.58,1439.69) 5237.51,2826.96 5237.54,2826.9 4310.61,2471.08 4310.71,2471.11 ccw(c1922.4,1848.93) 3769.45,3485.86 3769.38,3485.8 3212.16,3088.2 cw(c1021.57,1518.3)
GND on Bottom Layer "Bottom Layer" (solid, pour order 12): 4464.37,2205.82 4464.37,2149.84 4470.89,2141.37 4475.02,2136 4478.3,2136 4478.3,2140.31 4487.76,2152.6 4496,2163.31 4496,2208
GND on Bottom Layer "Bottom Layer" (solid, pour order 18): 4215,2071 4402.18,2071 4410.32,2065.41 4410.32,1925.56 4292.31,1925.56 4243.48,1892 4219.07,1908.78 4219.07,1995.48
GND on Bottom Layer "Bottom Layer" (solid, pour order 20): 4340,2199.27 4532.11,2199.27 4534.37,2200.27 4514.03,2191.27 4514.03,2099.27 4371.64,2099.27 4346.78,2088.27
GND on Bottom Layer "Bottom Layer" (solid, shelved, pour order 9): 4460.9,2205.82 4460.9,2143.1 4461,2143 4469,2135 4479,2135 4479,2140.99 4489.22,2151.21 4485,2155.43 4485,2207

## Other copper
Bottom Layer:
  rectangle net GND: 4464.37,2157 4481,2203.6
  rectangle net GND: 4378,2151.21 4398,2201

## Silkscreen, mask and mechanical layers (free items; w line width, h text height)
Mechanical 1:
  lines w10: 4312.53,2475.1 ccw(c1924.22,1852.95) 3771.26,3489.89 3213.98,3092.22 cw(c1023.38,1522.32) 3718.43,1520.02 5449.02,1505.14 ; 4312.53,2475.13 5239.33,2830.97 ; 5239.32,2830.98 cw(c764.4,1443.71) 5449.02,1505.11

## Text inside footprints (layer, text, board x,y; h text height)
J2: Top Overlay "6" at 3880.9,3016.96 h10 r110; Top Overlay "5" at 3974.87,3051.16 h10 r110; Top Overlay "2" at 4004.03,2678.67 h10 r110; Top Overlay "1" at 4091.16,2731.66 h10 r110
J3: Top Overlay "10" at 4705,2361 h10 r180; Top Overlay "9" at 4705,2461 h10 r180; Top Overlay "1" at 5260,2459 h10 r180; Top Overlay "2" at 5265,2361 h10 r180